# Altium PCB 800U R3N3_LED_V1.0.PcbDoc (part 2 of 2)
Units mm, origin at the board's own origin, x right, y up, seen from the top; angles counter-clockwise.
Board outline 308.48 x 220.22 mm, 4 copper layers (Top Layer, GND, Mid-Layer 2, Bottom Layer); 88 components, 70 nets, 229 pads, 84 vias.
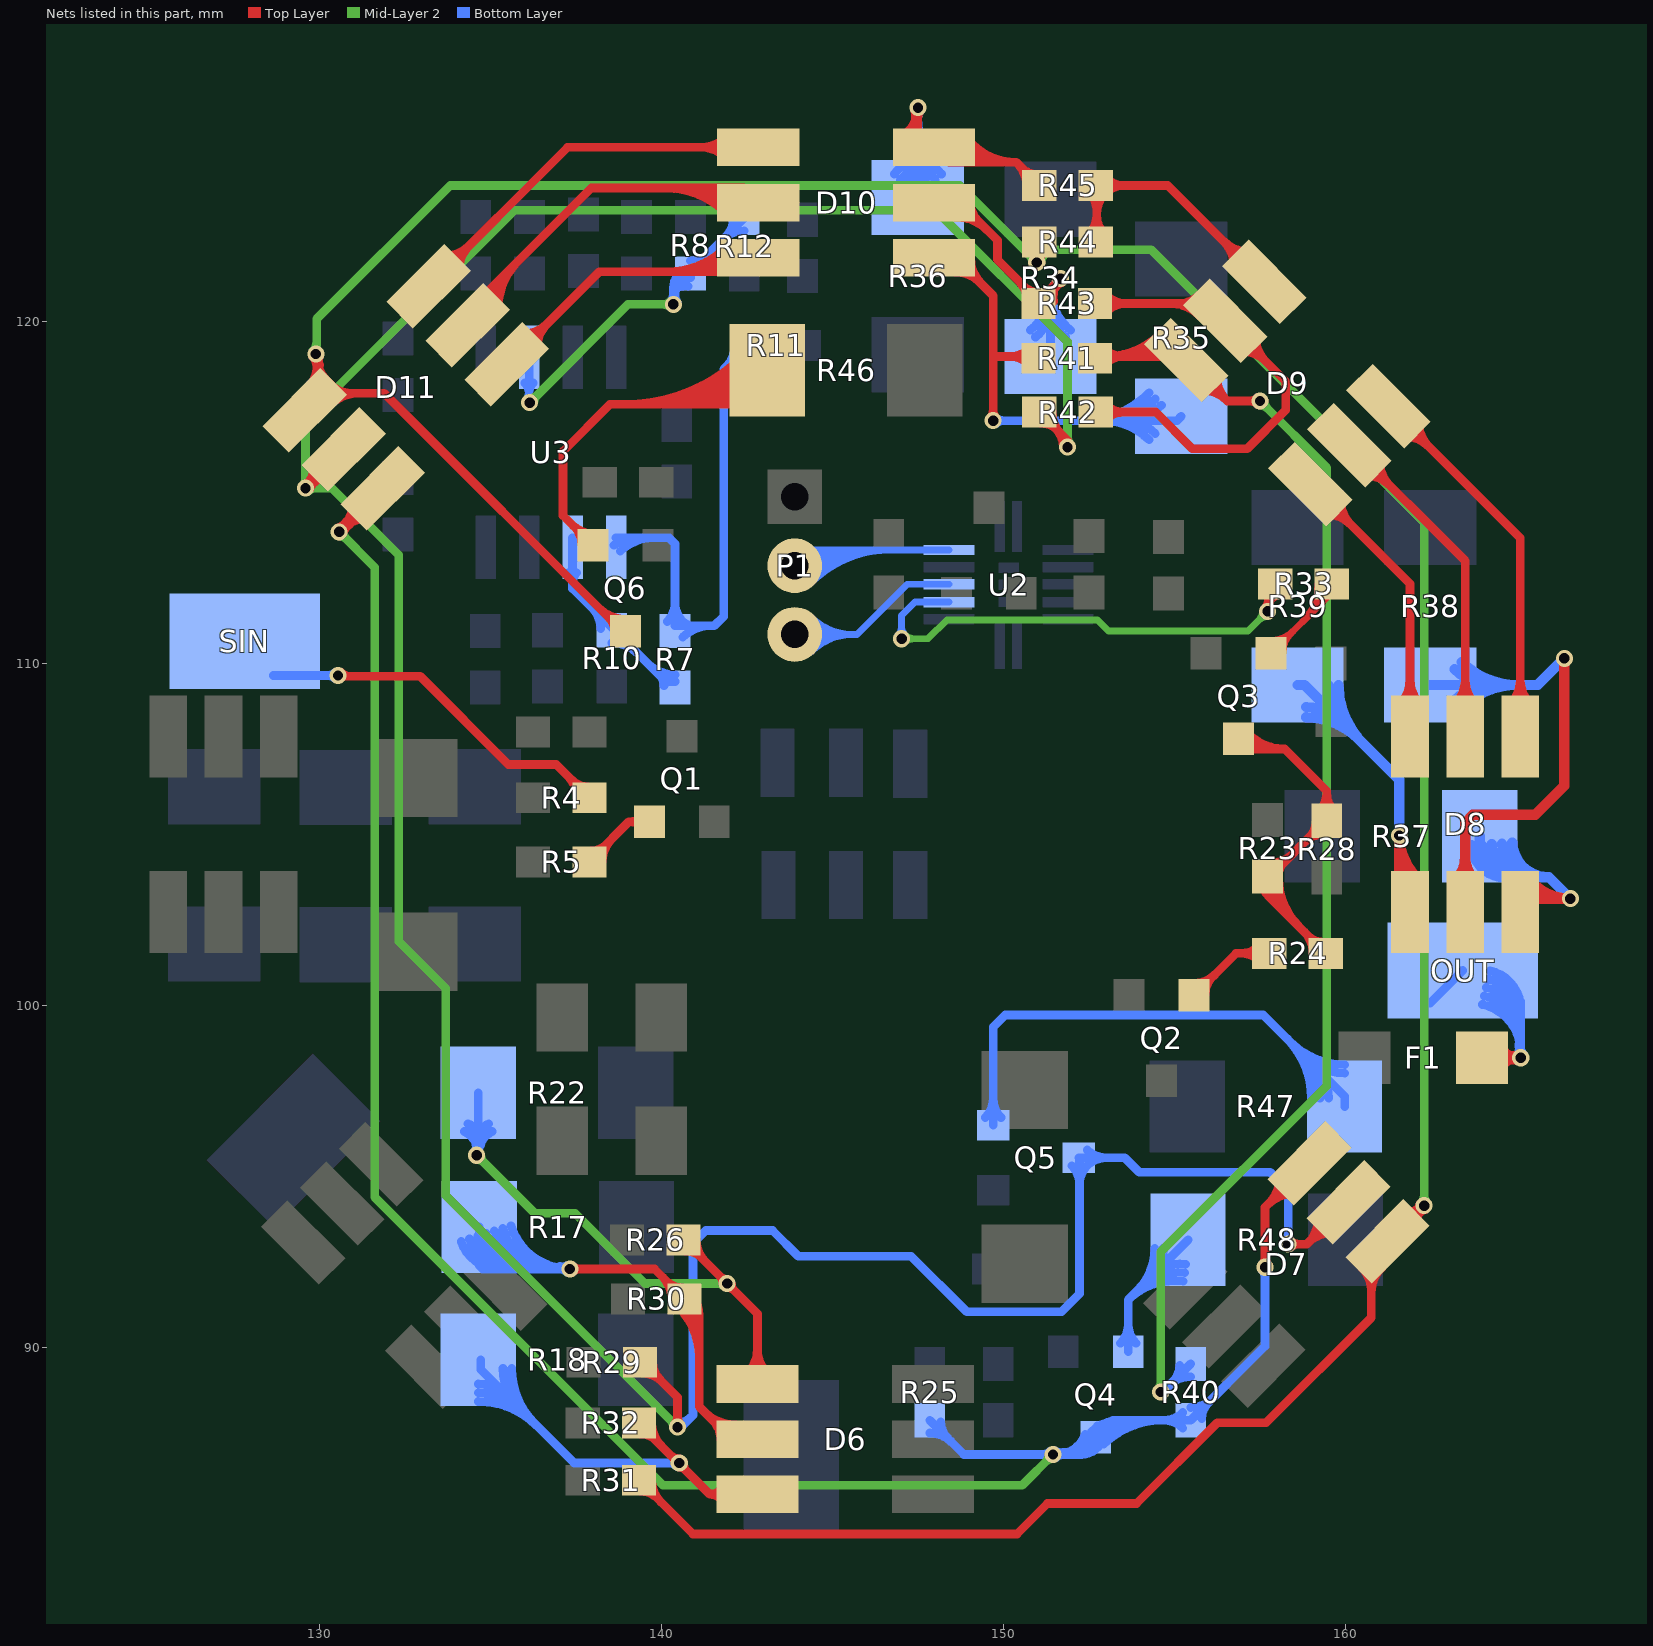
[diagram p4: the nets of this part, all layers, seen from the top]

## Via types
v1: diameter 0.5, hole 0.3, Top Layer to Bottom Layer, 77 vias
v2: diameter 0.8, hole 0.4, Top Layer to Bottom Layer, 7 vias

## Nets (pads, with @x,y where several pads share a name; then routed paths per layer and width w, separated by ;. In a path a pad name is that pad's centre, name@x,y a point inside that pad or via, vN(x,y) a via of type N, cw(c..) or ccw(c..) an arc to the next point about the centre after c; other vN are vias at no path point) (continued)
NetD6_4: D6.4 R22.2 R26.2 | length 24.3
  Top Layer w0.254: R26.2@140.65,93.15 v1(141.925,91.875) 142.81,90.99 D6.4@142.81,88.938 ; R26.2@140.7,92.827 cw(c140.7,92.168) 141.166,92.634 ; R26.2@141.023,93.15 ccw(c141.923,93.15) 141.287,92.513 ; v1@141.802,91.875 ccw(c141.505,91.875) 141.715,92.085 ccw(c141.925,92.295) v1@141.925,91.998 ; v1@141.925,91.752 cw(c141.925,91.455) 142.135,91.665 cw(c142.345,91.875) v1@142.048,91.875 ; D6.4@142.51,89.237 ccw(c141.788,89.959) 142.81,89.959 ccw(c143.831,89.959) D6.4@143.109,89.237
  Mid-Layer 2 w0.254: v1@134.6,95.502 cw(c134.6,95.205) 134.81,95.415 cw(c135.02,95.625) v1@134.723,95.625 ; v1(134.6,95.625) 136.3,93.925 137.475,93.925 139.525,91.875 v1(141.925,91.875) ; v1@141.838,91.788 ccw(c141.628,91.578) 141.628,91.875 ccw(c141.628,92.172) v1@141.838,91.962
  Bottom Layer w0.254: R22.2@134.24,96.318 cw(c133.941,95.675) v1@134.65,95.675 ; R22.2@134.347,96.548 cw(c134.126,96.073) 134.65,96.073 cw(c135.174,96.073) R22.2@134.953,96.548 ; v1@134.513,95.712 ccw(c134.182,96.043) 134.65,96.043 ; v1@134.519,95.718 ccw(c134.383,95.873) 134.583,95.927 ; v1@134.539,95.732 ccw(c134.33,96.093) 134.733,95.985 ; v1(134.6,95.625) v1@134.65,95.675 ; R22.2@134.65,97.45 v1@134.65,95.675 ; R22.2@135.06,96.318 ccw(c135.359,95.675) v1@134.65,95.675
NetD6_5: D6.5 R17.2 R30.2 | length 34.3
  Top Layer w0.254: v1(137.325,92.3) 139.8,92.3 R30.2@140.675,91.425 141.106,90.994 141.106,88.269 142.05,87.325 D6.5@142.81,87.325 ; v1@137.412,92.213 cw(c137.622,92.003) 137.622,92.3 cw(c137.622,92.597) v1@137.412,92.387 ; 140.038,92.062 cw(c139.401,91.425) R30.2@140.302,91.425 ; 140.159,91.941 ccw(c140.625,92.407) R30.2@140.625,91.748 ; R30.2@140.497,91.197 cw(c139.025,89.725) 141.106,89.725 ; R30.2@140.676,91.376 cw(c139.639,90.339) 141.106,90.339 ; R30.2@140.856,91.556 cw(c140.252,90.952) 141.106,90.952 ; 141.25,88.125 ccw(c142.16,89.034) D6.5@142.16,87.748 ; 141.515,87.86 cw(c140.98,87.325) D6.5@141.737,87.325 ; D6.5@141.684,87.691 ccw(c142.16,88.167) D6.5@142.16,87.494
  Bottom Layer w0.254: R17.2@134.149,93.111 ccw(c135.252,93.455) R17.2@135.252,92.3 ; R17.2@134.392,93.186 ccw(c135.597,93.563) R17.2@135.597,92.3 ; R17.2@134.634,93.262 ccw(c135.943,93.671) 135.943,92.3 ; R17.2@134.675,93.525 134.675,92.4 134.775,92.3 v1(137.325,92.3) cw(c137.325,94.103) R17.2@135.604,93.565 ; R17.2@134.876,93.338 ccw(c136.288,93.779) 136.288,92.3 ; R17.2@135.119,93.414 ccw(c136.634,93.887) 136.634,92.3 ; R17.2@135.361,93.49 ccw(c136.979,93.995) 136.979,92.3 ; v1@137.218,92.238 ccw(c136.961,92.09) 137.038,92.377 ccw(c137.115,92.664) v1@137.263,92.407 ; v1@137.238,92.213 ccw(c137.028,92.003) 137.028,92.3 ccw(c137.028,92.597) v1@137.238,92.387
NetD6_6: D6.6 R18.2 R32.2 | length 22.4
  Top Layer w0.254: R32.2@139.35,87.775 141.413,85.712 ; R32.2@139.4,87.477 cw(c139.4,86.878) 139.823,87.302 ; R32.2@139.723,87.8 ccw(c140.684,87.8) 140.004,87.121 ; 140.272,86.853 ccw(c140.525,87.105) v1@140.525,86.748 ; 140.333,86.792 cw(c140.165,86.625) v1@140.402,86.625 ; v1@140.525,86.502 cw(c140.525,86.265) 140.692,86.433 ; v1@140.648,86.625 ccw(c141.005,86.625) 140.753,86.372 ; D6.6@141.797,85.495 ccw(c141.413,85.265) 141.413,85.712 ; D6.6@141.797,85.93 cw(c141.413,86.16) 141.413,85.712 ; D6.6@142.81,85.712 141.413,85.712
  Bottom Layer w0.254: R18.2@134.65,88.427 cw(c134.65,86.018) 136.354,87.721 ; R18.2@134.65,88.681 cw(c134.65,86.885) 135.92,88.155 ; R18.2@134.65,88.935 cw(c134.65,87.752) R18.2@135.486,88.589 ; R18.2@134.725,89.65 134.725,89.35 137.45,86.625 v1(140.525,86.625) ; R18.2@135.369,89.4 ccw(c137.044,89.4) 135.86,88.215 ; R18.2@135.623,89.4 ccw(c137.912,89.4) 136.293,87.782 ; v1@140.438,86.538 ccw(c140.228,86.328) 140.228,86.625 ccw(c140.228,86.922) v1@140.438,86.712
NetD7_1: D7.1 D11.1 Q6.3 R31.2 R44.2 | length 116.4
  Top Layer w0.254: D11.1@129.731,118.16 ccw(c129.263,118.629) 129.925,118.629 ; v1@129.813,118.963 cw(c129.543,118.693) 129.925,118.693 ; v1@129.838,118.943 cw(c129.66,118.634) 130.005,118.727 ; v1(129.9,119.05) v1@129.925,119.025 ; D11.1@129.925,118.465 ccw(c130.559,118.465) D11.1@130.141,117.988 ; 129.983,118.809 cw(c130.211,118.87) v1@130.007,118.989 ; D11.1@130.309,118.179 cw(c131.048,119.025) v1@129.925,119.025 ; D11.1@130.329,117.562 cw(c131.145,116.746) 131.145,117.9 ; D11.1@130.329,118.16 ccw(c130.957,118.788) 130.957,117.9 ; 138.185,111.615 ccw(c138.95,112.38) Q6.3@138.95,111.298 ; 138.487,111.313 cw(c138.149,110.975) Q6.3@138.627,110.975 ; Q6.3@138.95,110.95 138.85,110.95 131.9,117.9 130.069,117.9 D11.1@129.57,117.401 129.925,117.756 v1@129.925,119.025 ; R31.2@139.375,86.1 140.925,84.55 150.4,84.55 151.292,85.442 153.892,85.442 156.25,87.8 157.675,87.8 160.75,90.875 160.75,92.625 D7.1@161.23,93.105 v1@162.275,94.15 ; R31.2@139.4,85.802 cw(c139.4,85.143) 139.866,85.609 ; R31.2@139.723,86.125 ccw(c140.623,86.125) 139.987,85.488 ; v1@150.888,121.812 ccw(c150.437,122.263) R44.2@151.075,122.263 ; R44.2@150.942,122.031 cw(c150.85,121.825) v1@151.075,121.825 ; v1(150.975,121.725) v1@151.075,121.825 ; R44.2@151.075,122.325 v1@151.075,121.825 ; R44.2@151.208,122.031 ccw(c151.3,121.825) v1@151.075,121.825 ; D7.1@160.471,92.346 cw(c159.797,91.672) 160.75,91.672 ; 160.75,91.576 cw(c161.839,91.576) D7.1@161.069,92.346 ; D7.1@161.756,93.982 ccw(c161.851,94.574) v1@162.275,94.15 ; D7.1@162.012,93.998 cw(c162.179,93.709) v1@162.268,94.031 ; D7.1@162.047,93.922 cw(c162.3,93.67) v1@162.3,94.027 ; 162.063,94.028 ccw(c161.936,94.248) v1@162.181,94.182 ; D7.1@162.107,93.631 cw(c162.699,93.726) v1@162.275,94.15 ; 162.108,93.983 ccw(c161.941,94.15) v1@162.177,94.15 ; D7.1@162.113,93.87 cw(c162.406,93.701) v1@162.328,94.03 ; v1(162.3,94.15) v1@162.275,94.15
  Mid-Layer 2 w0.254: v1@129.813,119.137 ccw(c129.543,119.407) 129.925,119.407 ; v1(129.9,119.05) 129.925,119.075 129.925,120.075 133.825,123.975 148.725,123.975 v1(150.975,121.725) 151.35,122.1 154.325,122.1 162.3,114.125 v1(162.3,94.15) ; v1@150.852,121.725 ccw(c150.555,121.725) 150.765,121.935 ccw(c150.975,122.145) 150.975,121.848 ccw(c150.975,122.145) 151.185,121.935 ccw(c151.395,121.725) v1@151.098,121.725 ; v1@162.213,94.237 ccw(c162.003,94.447) 162.3,94.447 ccw(c162.597,94.447) v1@162.387,94.237
NetD7_2: D7.2 D11.2 Q5.3 R29.2 R42.2 | length 115.2
  Top Layer w0.254: v1@129.568,115.244 ccw(c129.502,115.489) 129.723,115.362 ; v1(129.6,115.125) v1@129.6,115.15 ; v1@129.6,115.248 ccw(c129.6,115.485) 129.767,115.317 ; v1@129.719,115.093 cw(c130.077,114.997) 129.892,115.318 ; v1@129.719,115.157 cw(c130.047,115.245) 129.753,115.415 ; v1@129.723,115.125 cw(c130.08,115.125) 129.828,115.378 ; D11.2@129.83,115.769 cw(c129.04,115.71) v1@129.6,115.15 ; D11.2@130.219,115.38 ccw(c130.16,114.59) v1@129.6,115.15 ; D11.2@130.711,116.261 v1@129.6,115.15 ; R29.2@139.35,89.45 139.575,89.45 140.475,88.55 v1(140.475,87.675) ; R29.2@139.425,89.252 cw(c139.425,88.412) 140.019,89.006 ; R29.2@139.748,89.575 ccw(c140.467,89.575) 139.959,89.066 ; v1@140.388,87.762 ccw(c140.178,87.972) 140.475,87.972 ccw(c140.772,87.972) v1@140.562,87.762 ; R42.2@151.05,117.35 151.875,116.525 v1@151.875,116.35 ; R42.2@151.1,117.027 cw(c151.1,116.368) 151.566,116.834 ; R42.2@151.423,117.35 ccw(c152.323,117.35) 151.687,116.713 ; 151.524,116.876 cw(c150.972,116.325) v1@151.752,116.325 ; v1(158.325,93.025) 158.869,93.025 D7.2@160.089,94.245 ; v1@158.412,92.938 cw(c158.622,92.728) 158.622,93.025 cw(c158.622,93.322) v1@158.412,93.112 ; D7.2@159.206,93.785 cw(c158.185,93.785) 158.907,93.063 cw(c159.629,92.341) D7.2@159.629,93.362
  Mid-Layer 2 w0.254: v1@129.513,115.212 ccw(c129.303,115.422) 129.6,115.422 ccw(c129.897,115.422) 129.687,115.212 ccw(c129.897,115.422) 129.897,115.125 ccw(c129.897,114.828) v1@129.687,115.038 ; v1@140.352,87.675 ccw(c140.055,87.675) 140.265,87.885 ccw(c140.475,88.095) v1@140.475,87.798 ; v1(140.475,87.675) 133.7,94.45 133.7,100.5 132.325,101.875 132.325,113.175 130.375,115.125 v1(129.6,115.125) 129.6,117.15 135.7,123.25 148.025,123.25 151.875,119.4 v1@151.875,116.35 ; v1@151.788,116.412 ccw(c151.578,116.622) 151.875,116.622 ccw(c152.172,116.622) v1@151.962,116.412
  Bottom Layer w0.254: v1(140.475,87.675) 140.525,87.625 140.925,88.025 140.925,93.05 141.3,93.425 143.25,93.425 144,92.675 147.3,92.675 148.925,91.05 151.7,91.05 152.225,91.575 Q5.3@152.225,95.55 ; v1@140.475,87.798 ccw(c140.475,88.336) 140.856,87.956 ; Q5.3@151.997,95.322 cw(c151.445,94.77) 152.225,94.77 cw(c153.005,94.77) 152.453,95.322 cw(c153.005,94.77) 153.005,95.55 cw(c153.005,96.33) Q5.3@152.453,95.778 ; Q5.3@152.2,95.55 153.55,95.55 153.975,95.125 157.8,95.125 158.325,94.6 v1(158.325,93.025) ; v1@158.238,93.112 ccw(c158.028,93.322) 158.325,93.322 ccw(c158.622,93.322) v1@158.412,93.112
  other v1: 151.875,116.325
NetD7_3: D7.3 D11.3 Q4.3 R25.2 R40.2 | length 82.9
  Top Layer w0.254: v1@130.549,113.969 ccw(c130.444,114.363) 130.797,114.159 ; v1(130.581,113.85) D11.3@131.851,115.12 ; v1@130.581,113.973 ccw(c130.581,114.27) 130.791,114.06 ccw(c131.001,113.85) v1@130.704,113.85 ; v1@130.7,113.818 cw(c131.094,113.713) 130.89,114.066 ; D11.3@130.969,114.661 cw(c129.948,114.661) 130.67,113.939 cw(c131.392,113.217) D11.3@131.392,114.238 ; v1@157.563,92.437 ccw(c157.353,92.647) 157.65,92.647 ccw(c157.947,92.647) v1@157.737,92.437 ; v1(157.65,92.35) 157.65,94.1 158.936,95.386 D7.3@158.949,95.386 ; 157.745,94.195 cw(c158.489,93.45) D7.3@158.489,94.503 ; 157.776,94.226 ccw(c157.076,94.926) D7.3@158.066,94.926
  Mid-Layer 2 w0.254: v1@130.581,113.727 cw(c130.581,113.43) 130.791,113.64 cw(c131.001,113.85) v1@130.704,113.85 ; v1(130.581,113.85) 131.625,112.806 131.625,94.4 140.05,85.975 150.55,85.975 v1(151.45,86.875) ; v1@151.327,86.875 cw(c151.03,86.875) 151.24,86.665 cw(c151.45,86.455) v1@151.45,86.752
  Bottom Layer w0.254: R25.2@147.85,87.502 cw(c147.85,86.602) 148.487,87.238 ; R25.2@147.85,87.875 148.85,86.875 v1(151.45,86.875) ; R25.2@148.173,87.825 ccw(c148.832,87.825) 148.366,87.359 ; v1@151.363,86.788 ccw(c151.153,86.578) 151.153,86.875 ccw(c151.153,87.172) v1@151.363,86.962 ; v1@151.45,86.775 v1@151.55,86.875 ; v1@151.511,86.982 ccw(c151.704,87.315) 151.804,86.943 ; v1@151.537,86.788 cw(c151.747,86.578) 151.747,86.875 cw(c151.747,87.172) v1@151.537,86.962 ; 151.916,86.875 ccw(c151.916,87.643) Q4.3@152.635,87.374 ; 152.282,86.875 ccw(c152.282,87.506) Q4.3@152.873,87.285 ; Q4.3@152.377,87.334 cw(c151.77,87.305) 152.2,86.875 ; Q4.3@152.397,87.463 cw(c151.55,87.78) v1@151.55,86.875 ; Q4.3@152.569,87.531 cw(c153.4,86.7) 153.4,87.875 ; Q4.3@152.657,87.03 ccw(c152.585,86.49) 152.2,86.875 ; Q4.3@152.743,87.72 ccw(c152.815,88.26) 153.2,87.875 ; Q4.3@152.749,87.351 cw(c154.013,86.087) 154.013,87.875 ; Q4.3@152.928,87.172 cw(c154.627,85.473) 154.627,87.875 ; Q4.3@153.023,87.416 cw(c153.63,87.445) 153.2,87.875 ; R40.2@155.247,87.647 ccw(c154.695,87.095) 154.695,87.875 ccw(c154.695,88.655) R40.2@155.247,88.103 ; R40.2@155.475,88.248 ccw(c155.475,89.148) 156.112,88.512 ; R40.2@155.798,87.925 cw(c156.457,87.925) 155.991,88.391 ; v1@157.563,92.263 cw(c157.353,92.053) 157.65,92.053 cw(c157.947,92.053) v1@157.737,92.263 ; v1(157.65,92.35) 157.65,90.05 R40.2@155.475,87.875 153.2,87.875 ; v1@151.55,86.875 152.2,86.875 ; 152.2,86.875 Q4.3@152.7,87.375 153.2,87.875
NetD8_1: D8.1 D9.6 | length 14.5
  Top Layer w0.254: D9.6@161.255,117.526 165.113,113.668 D8.1@165.113,107.865 ; D9.6@161.714,116.644 cw(c161.714,115.623) 162.436,116.345 cw(c163.158,117.067) D9.6@162.137,117.067 ; D8.1@164.814,108.815 ccw(c164.092,109.537) 165.113,109.537 ccw(c166.134,109.537) D8.1@165.412,108.815
NetD8_2: D8.2 D9.5 | length 13.1
  Top Layer w0.254: D9.5@160.114,116.386 163.5,113 D8.2@163.5,107.865 ; D9.5@160.574,115.503 cw(c160.574,114.482) 161.296,115.204 cw(c162.018,115.926) D9.5@160.997,115.926 ; D8.2@163.201,108.815 ccw(c162.479,109.537) 163.5,109.537 ccw(c164.521,109.537) D8.2@163.799,108.815
NetD8_3: D8.3 D9.4 | length 11.8
  Top Layer w0.254: D9.4@158.974,115.245 161.887,112.332 D8.3@161.887,107.865 ; D9.4@159.433,114.363 cw(c159.433,113.342) 160.155,114.064 cw(c160.877,114.786) D9.4@159.856,114.786 ; D8.3@161.588,108.815 ccw(c160.866,109.537) 161.887,109.537 ccw(c162.908,109.537) D8.3@162.186,108.815
NetD8_4: D8.4 R39.2 | length 16.6
  Top Layer w0.3: 161.575,104.305 ccw(c162.709,104.305) D8.4@161.954,103.459 ; D8.4@161.887,102.735 161.575,103.047 v1(161.575,104.975) ccw(c163.307,104.975) D8.4@162.153,103.683
  Bottom Layer w0.3: R39.2@158.6,109.375 158.8,109.375 161.575,106.6 v1(161.575,104.975) ; R39.2@158.85,108.425 cw(c158.85,106.252) 160.386,107.789 ; R39.2@158.85,108.725 cw(c158.85,107.276) R39.2@159.874,108.301 ; R39.2@159.5,109.375 ccw(c161.19,109.375) 159.995,108.18 ; R39.2@159.8,109.375 ccw(c162.214,109.375) 160.507,107.668
NetD8_5: D8.5 R38.2 | length 21.5
  Top Layer w0.3: D8.5@163.217,103.667 ccw(c162.534,104.35) 163.5,104.35 ccw(c164.466,104.35) D8.5@163.783,103.667 ; D8.5@163.5,102.735 163.5,105.35 163.725,105.575 165.55,105.575 166.4,106.425 v1(166.4,110.15)
  Bottom Layer w0.3: R38.2@162.475,109.375 165.625,109.375 v1(166.4,110.15) ; R38.2@163.185,108.915 cw(c164.294,107.806) 164.294,109.375 cw(c164.294,110.944) R38.2@163.185,109.835 ; R38.2@163.397,108.703 cw(c165.019,107.081) 165.019,109.375 cw(c165.019,111.669) R38.2@163.397,110.047
NetD8_6: D8.6 R37.2 | length 15.2
  Top Layer w0.3: D8.6@165.113,102.735 165.503,103.125 v1(166.575,103.125) cw(c166.575,104.675) D8.6@165.413,103.649 ; D8.6@165.188,103.451 ccw(c165.91,104.088) 165.91,103.125
  Bottom Layer w0.3: R37.2@163.676,104.684 ccw(c164.671,104.748) R37.2@164.671,103.75 ; R37.2@163.925,104.95 163.925,104.575 164.75,103.75 165.95,103.75 ; R37.2@163.975,104.703 ccw(c164.991,104.768) R37.2@164.991,103.75 ; R37.2@164.274,104.722 ccw(c165.31,104.788) 165.31,103.75 ; R37.2@164.574,104.741 ccw(c165.63,104.809) 165.63,103.75 ; R37.2@164.873,104.76 ccw(c165.95,104.829) 165.95,103.75 ; v1(166.575,103.125) 165.95,103.75
NetD9_1: D9.1 R44.1 R45.1 | length 13
  Top Layer w0.254: R44.1@152.497,122.553 ccw(c151.945,123.105) 152.725,123.105 ccw(c153.505,123.105) R44.1@152.953,122.553 ; R45.1@152.522,123.747 cw(c152.031,123.256) 152.725,123.256 ; R44.1@152.725,122.325 152.725,123.95 R45.1@152.7,123.975 154.806,123.975 D9.1@157.626,121.155 ; 152.725,123.135 cw(c153.59,123.135) 152.978,123.747 cw(c153.53,123.195) 153.53,123.975 cw(c153.53,124.755) R45.1@152.978,124.203 ; D9.1@156.744,121.614 ccw(c155.723,121.614) 156.445,122.336 ccw(c157.167,123.058) D9.1@157.167,122.037
NetD9_2: D9.2 R42.1 R43.1 | length 19.3
  Top Layer w0.254: R43.1@152.75,120.525 155.975,120.525 D9.2@156.486,120.014 158.25,118.25 158.25,117.4 157.125,116.275 155.525,116.275 154.45,117.35 R42.1@152.775,117.35 ; R42.1@152.978,117.122 cw(c153.53,116.57) 153.53,117.35 cw(c153.53,118.13) R42.1@152.978,117.578 ; R43.1@153.028,120.297 cw(c153.58,119.745) 153.58,120.525 cw(c153.58,121.305) R43.1@153.028,120.753 ; 154.881,120.525 cw(c154.881,119.328) D9.2@155.727,120.175 ; 155.129,120.525 ccw(c155.129,121.371) D9.2@155.727,120.773 ; D9.2@156.946,119.131 cw(c156.946,118.11) 157.668,118.832 cw(c158.39,119.554) D9.2@157.369,119.554
NetD9_3: D9.3 R40.1 R41.1 | length 48.5
  Top Layer w0.254: R41.1@152.675,118.975 155.244,118.975 D9.3@155.345,118.874 156.544,117.675 v1(157.5,117.675) ; R41.1@152.953,118.747 cw(c153.505,118.195) 153.505,118.975 cw(c153.505,119.755) R41.1@152.953,119.203 ; R41.1@153,118.975 ccw(c153,121.219) D9.3@154.587,119.632 ; 153.613,118.975 ccw(c153.613,120.606) D9.3@154.766,119.453 ; 154.226,118.975 ccw(c154.226,119.993) D9.3@154.946,119.273 ; D9.3@155.805,117.991 cw(c155.805,116.97) 156.527,117.692 cw(c157.249,118.414) D9.3@156.228,118.414 ; v1@157.413,117.588 ccw(c157.203,117.378) 157.203,117.675 ccw(c157.203,117.972) v1@157.413,117.762
  Mid-Layer 2 w0.254: v1@154.513,88.787 ccw(c154.303,88.997) 154.6,88.997 ccw(c154.897,88.997) v1@154.687,88.787 ; v1(154.6,88.7) 154.6,92.8 159.45,97.65 159.45,115.725 v1(157.5,117.675) ; v1@157.5,117.552 cw(c157.5,117.255) 157.71,117.465 cw(c157.92,117.675) v1@157.623,117.675
  Bottom Layer w0.254: v1(154.6,88.7) 154.675,88.625 154.675,88.725 R40.1@155.475,89.525 ; v1@154.6,88.823 ccw(c154.6,89.241) 154.895,88.945 ; v1@154.719,88.668 cw(c155.15,88.553) 154.927,88.939 ; 154.838,88.888 cw(c155.475,88.251) R40.1@155.475,89.152 ; 154.959,89.009 ccw(c154.493,89.475) R40.1@155.152,89.475
NetD10_1: D10.1 D11.6 | length 14.5
  Top Layer w0.254: D11.6@133.199,121.03 137.257,125.088 D10.1@142.835,125.088 ; D11.6@133.658,121.912 ccw(c133.658,122.933) 134.38,122.211 ccw(c135.102,121.489) D11.6@134.081,121.489 ; D10.1@141.885,124.789 ccw(c141.163,124.067) 141.163,125.088 ccw(c141.163,126.109) D10.1@141.885,125.387
NetD10_2: D10.2 D11.5 | length 18.2
  Top Layer w0.254: D11.5@134.339,119.889 134.339,120.289 137.95,123.9 142.41,123.9 D10.2@142.835,123.475 ; D11.5@134.714,120.349 cw(c135.474,120.349) D11.5@134.936,120.886 ; D11.5@134.968,120.349 cw(c136.341,120.349) 135.37,121.32 ; D11.5@135.222,120.349 cw(c137.209,120.349) 135.804,121.754 ; 140.137,123.9 cw(c140.137,121.428) D10.2@141.885,123.176 ; 140.751,123.9 cw(c140.751,122.041) D10.2@142.065,123.356 ; 141.364,123.9 cw(c141.364,122.654) D10.2@142.245,123.535
NetD10_3: D10.3 D11.4 | length 14.5
  Top Layer w0.254: D11.4@135.48,118.749 138.181,121.45 142.422,121.45 D10.3@142.835,121.862 ; D11.4@135.939,119.631 ccw(c135.939,120.652) 136.661,119.93 ccw(c137.383,119.208) D11.4@136.362,119.208 ; 140.168,121.45 ccw(c140.168,123.878) D10.3@141.885,122.161 ; 140.782,121.45 ccw(c140.782,123.265) D10.3@142.065,121.982 ; 141.395,121.45 ccw(c141.395,122.652) D10.3@142.245,121.802
NetD10_4: D10.4 R35.2 R41.2 | length 24.1
  Top Layer w0.254: D10.4@147.965,121.862 148.588,121.862 149.7,120.75 v1(149.7,117.1) ; D10.4@148.615,121.439 cw(c148.615,120.484) 149.291,121.159 ; D10.4@149.038,121.862 ccw(c150.126,121.862) 149.357,121.093 ; v1@149.613,117.187 ccw(c149.403,117.397) 149.7,117.397 ccw(c149.997,117.397) v1@149.787,117.187 ; 149.725,118.975 R41.2@151.025,118.975 ; R41.2@150.747,118.747 ccw(c150.195,118.195) 150.195,118.975 ccw(c150.195,119.755) R41.2@150.747,119.203
  Bottom Layer w0.254: v1(149.7,117.1) 155.075,117.1 R35.2@155.2,117.225 ; v1@149.787,117.013 cw(c149.997,116.803) 149.997,117.1 cw(c149.997,117.397) v1@149.787,117.187 ; 152.299,117.1 ccw(c152.299,119.876) R35.2@154.262,117.913 ; 152.903,117.1 cw(c152.903,115.178) R35.2@154.262,116.537 ; 152.912,117.1 ccw(c152.912,119.263) R35.2@154.442,117.733 ; 153.516,117.1 cw(c153.516,115.791) R35.2@154.442,116.717 ; 153.526,117.1 ccw(c153.526,118.649) R35.2@154.621,117.554
NetD10_5: D10.5 R34.2 R43.2 | length 18.6
  Top Layer w0.254: D10.5@147.965,123.475 148.725,123.475 149.825,122.375 149.825,121.8 151.1,120.525 151.1,120.675 v1(151.675,121.25) ccw(c152.205,120.719) R43.2@151.468,120.584 ; D10.5@148.615,123.052 cw(c148.615,121.766) 149.525,122.675 ; D10.5@148.615,123.306 cw(c148.615,122.633) D10.5@149.091,123.109 ; D10.5@149.038,123.475 ccw(c149.795,123.475) 149.26,122.94 ; 150.463,121.162 cw(c149.827,120.525) R43.2@150.727,120.525 ; 150.584,121.041 ccw(c151.05,121.507) R43.2@151.05,120.848 ; R43.2@151.15,120.848 ccw(c151.15,121.145) R43.2@151.36,120.935 ; v1@151.552,121.25 cw(c151.255,121.25) 151.465,121.04 cw(c151.675,120.83) v1@151.675,121.127 ; v1@151.556,121.218 cw(c151.269,121.141) 151.527,120.993 cw(c151.784,120.844) v1@151.707,121.131
  Bottom Layer w0.254: R34.2@150.782,119.746 ccw(c149.857,120.95) 151.375,120.95 ; R34.2@150.937,119.545 ccw(c150.253,120.434) 151.375,120.434 ccw(c152.497,120.434) R34.2@151.813,119.545 ; R34.2@151.375,118.975 151.375,120.95 ; v1@151.552,121.25 cw(c151.255,121.25) 151.465,121.04 cw(c151.675,120.83) v1@151.675,121.127 ; v1(151.675,121.25) 151.375,120.95 ; R34.2@151.968,119.746 cw(c152.893,120.95) 151.375,120.95
NetD10_6: D10.6 R36.2 R45.2 | length 24.1
  Top Layer w0.254: D10.6@147.074,125.435 ccw(c146.508,126.25) v1(147.5,126.25) 147.5,125.553 D10.6@147.965,125.088 148.403,124.65 150.375,124.65 R45.2@151.05,123.975 ; D10.6@147.219,125.227 ccw(c146.846,125.764) 147.5,125.764 ; v1@147.393,126.189 cw(c147.136,126.04) 147.423,125.963 cw(c147.71,125.886) v1@147.561,126.143 ; v1@147.413,126.163 cw(c147.203,125.953) 147.5,125.953 cw(c147.797,125.953) v1@147.587,126.163 ; 147.5,125.663 ccw(c147.891,125.663) D10.6@147.615,125.387 ; D10.6@148.548,125.036 ccw(c149.337,125.649) 149.337,124.65 ; D10.6@148.749,125.192 ccw(c149.856,126.052) 149.856,124.65 ; D10.6@148.949,125.347 ccw(c150.375,126.456) 150.375,124.65 ; 150.413,124.612 cw(c149.777,123.975) R45.2@150.677,123.975 ; 150.534,124.491 ccw(c151,124.957) R45.2@151,124.298
  Bottom Layer w0.254: R36.2@146.812,124.313 ccw(c145.151,125.974) 147.5,125.974 ccw(c149.849,125.974) R36.2@148.188,124.313 ; R36.2@146.992,124.133 ccw(c145.764,125.361) 147.5,125.361 ccw(c149.236,125.361) R36.2@148.008,124.133 ; R36.2@147.171,123.954 ccw(c146.377,124.748) 147.5,124.748 ccw(c148.623,124.748) R36.2@147.829,123.954 ; v1@147.413,126.163 cw(c147.203,125.953) 147.5,125.953 cw(c147.797,125.953) v1@147.587,126.163 ; R36.2@147.5,123.625 v1(147.5,126.25)
NetLED_CTL_1: 
NetP1_2: P1.2 U2.10 | length 13.7
  Bottom Layer w0.2: P1.2@143.829,112.931 cw(c144.765,111.995) 144.765,113.318 ; P1.2@143.971,112.789 cw(c145.248,111.512) 145.248,113.318 ; P1.2@144.112,112.648 cw(c145.731,111.029) 145.731,113.318 ; P1.2@144.254,112.506 cw(c146.214,110.546) 146.214,113.318 ; P1.2@144.358,113.318 U2.10@148.412,113.318 ; P1.2@144.395,112.365 cw(c146.697,110.063) 146.697,113.318
  Bottom Layer w0.254: P1.2@143.9,112.86 P1.2@144.358,113.318
NetP1_3: P1.3 U2.8 | length 9.7
  Bottom Layer w0.2: P1.3@143.9,110.85 145.725,110.85 147.193,112.318 U2.8@148.412,112.318 ; P1.3@144.254,110.496 cw(c145.107,109.643) 145.107,110.85 cw(c145.107,112.057) P1.3@144.254,111.204 ; P1.3@144.395,110.355 cw(c145.59,109.16) 145.59,110.85 cw(c145.59,112.54) P1.3@144.395,111.345
NetQ1_1: Q1.1 R5.2 | length 4.8
  Top Layer w0.254: R5.2@137.9,104.4 138.075,104.4 139.05,105.375 ; R5.2@137.95,104.523 ccw(c137.95,105.122) 138.373,104.698 ; R5.2@138.273,104.2 cw(c139.234,104.2) 138.554,104.879 ; Q1.1@139.596,105.148 ccw(c139.05,104.607) 139.05,105.375 ; Q1.1@139.596,105.602 cw(c139.05,106.143) 139.05,105.375 ; Q1.1@139.825,105.375 139.05,105.375
NetQ2_1: Q2.1 R24.2 | length 5.2
  Top Layer w0.254: Q2.1@155.575,100.3 156.8,101.525 R24.2@157.775,101.525 ; Q2.1@155.575,100.648 ccw(c155.575,101.488) 156.169,100.894 ; Q2.1@155.898,100.325 cw(c156.617,100.325) 156.109,100.834 ; R24.2@157.497,101.297 ccw(c156.945,100.745) 156.945,101.525 ccw(c156.945,102.305) R24.2@157.497,101.753
NetQ3_1: Q3.1 R33.1 | length 6.2
  Top Layer w0.2: Q3.1@157.825,110.3 159.6,112.075 R33.1@159.6,112.325 ; Q3.1@157.825,110.675 ccw(c157.825,111.58) 158.465,110.94 ; Q3.1@158.175,110.325 cw(c158.96,110.325) 158.405,110.88 ; 158.74,111.215 ccw(c157.631,112.325) R33.1@159.2,112.325 ; 159.082,111.557 ccw(c158.314,112.325) R33.1@159.4,112.325
NetQ3_3: Q3.3 R23.1 R24.1 R28.1 | length 20.2
  Top Layer w0.254: Q3.3@156.875,107.8 157.175,107.5 158.225,107.5 ; Q3.3@156.926,107.821 ccw(c157.652,108.479) 157.652,107.5 ; Q3.3@157.114,107.992 ccw(c158.225,109) 158.225,107.5 ; R23.1@157.54,103.725 ccw(c158.3,103.725) 157.763,103.187 ; R23.1@157.592,103.431 cw(c157.5,103.225) 157.725,103.225 ; R23.1@157.725,104.148 ccw(c157.725,105.23) 158.49,104.465 ; R23.1@157.794,103.725 ccw(c159.168,103.725) 158.196,102.754 ; R23.1@157.858,103.431 ccw(c157.95,103.225) 157.725,103.225 ; R23.1@158.048,103.725 ccw(c160.035,103.725) 158.63,102.32 ; R23.1@158.048,103.825 cw(c158.526,103.825) 158.188,104.163 ; 158.771,104.746 cw(c159.45,104.066) R28.1@159.45,105.027 ; 158.788,102.162 cw(c158.152,101.525) R24.1@159.052,101.525 ; 158.909,102.041 ccw(c159.375,102.507) R24.1@159.375,101.848 ; 158.952,104.927 ccw(c158.528,105.35) R28.1@159.127,105.35 ; R28.1@159.222,105.678 ccw(c158.67,106.23) 159.45,106.23 ccw(c160.23,106.23) R28.1@159.678,105.678 ; R24.1@159.425,101.525 157.725,103.225 ; 157.725,103.225 R23.1@157.725,103.775 157.8,103.775 159.425,105.4 R28.1@159.45,105.4 159.45,106.275 158.225,107.5
NetQ4_2: Q4.2 R48.1 | length 11.7
  Bottom Layer w0.254: Q4.2@153.422,90.128 ccw(c152.87,90.68) 153.65,90.68 ccw(c154.43,90.68) Q4.2@153.878,90.128 ; Q4.2@153.65,89.875 153.65,91.4 ; 153.916,91.666 ccw(c152.682,92.9) R48.1@154.427,92.9 ; 154.009,91.759 cw(c155.082,90.686) R48.1@155.298,92.188 ; R48.1@154.349,92.099 ccw(c153.549,92.9) R48.1@154.681,92.9 ; R48.1@154.368,92.118 cw(c155.172,91.314) R48.1@155.334,92.44 ; R48.1@155.262,91.937 ccw(c154.992,90.058) 153.65,91.4 ; R48.1@155.4,93.15 153.65,91.4
NetQ5_2: Q5.2 R47.1 | length 23.2
  Bottom Layer w0.254: Q5.2@149.472,96.728 ccw(c148.92,97.28) 149.7,97.28 ccw(c150.48,97.28) Q5.2@149.928,96.728 ; Q5.2@149.7,96.5 149.7,99.375 150.05,99.725 157.6,99.725 159.975,97.35 R47.1@159.975,97.05 ; 158.279,99.046 cw(c156.532,97.3) R47.1@159.002,97.3 ; 158.399,98.926 ccw(c159.975,100.501) R47.1@159.975,98.273 ; 158.712,98.613 cw(c157.399,97.3) R47.1@159.256,97.3 ; 158.833,98.492 ccw(c159.975,99.634) R47.1@159.975,98.019 ; R47.1@159.146,98.179 cw(c158.267,97.3) R47.1@159.51,97.3
NetQ6_2: Q6.2 R46.1 | length 27.2
  Top Layer w0.254: 137.406,114.044 ccw(c138,114.638) Q6.2@138,113.798 ; 137.466,113.984 cw(c136.958,113.475) Q6.2@137.677,113.475 ; Q6.2@138,113.45 137.125,114.325 137.125,116.2 138.5,117.575 142.1,117.575 R46.1@143.1,118.575 ; 138.94,117.575 ccw(c138.94,122.485) R46.1@142.412,119.013 ; 139.554,117.575 ccw(c139.554,121.871) R46.1@142.592,118.833 ; 140.167,117.575 ccw(c140.167,121.258) R46.1@142.771,118.654 ; 140.78,117.575 ccw(c140.78,120.645) R46.1@142.951,118.474 ; 141.393,117.575 ccw(c141.393,120.032) R46.1@143.13,118.295 ; R46.1@142.006,117.575 ccw(c142.006,119.419) R46.1@143.31,118.115
NetR7_1: R7.1 R10.2 U3.2 | length 9.9
  Bottom Layer w0.254: U3.2@137.283,112.653 cw(c136.987,112.357) 137.405,112.357 cw(c137.823,112.357) U3.2@137.527,112.653 ; U3.2@137.405,113.675 137.405,112.195 138.55,111.05 140.125,109.475 R7.1@140.4,109.475 ; 137.981,111.619 cw(c137.387,111.025) R10.2@138.227,111.025 ; 138.041,111.559 ccw(c138.55,112.067) R10.2@138.55,111.348 ; R10.2@138.55,110.602 cw(c138.55,109.52) 139.315,110.285 ; R10.2@138.873,110.925 ccw(c139.351,110.925) 139.013,110.587 ; 139.593,110.007 ccw(c140.4,110.815) R7.1@140.4,109.673 ; R7.1@139.955,109.645 cw(c139.659,109.35) R7.1@140.077,109.35
NetR7_2: R7.2 R11.1 U3.1 | length 19.3
  Bottom Layer w0.254: U3.1@138.618,113.457 cw(c139.143,112.932) 139.143,113.675 ; U3.1@138.675,113.675 140.225,113.675 140.4,113.5 R7.2@140.4,111.125 ; U3.1@138.797,113.278 cw(c139.757,112.318) 139.757,113.675 ; R7.2@140.172,111.228 ccw(c139.62,111.78) 140.4,111.78 ccw(c141.18,111.78) 140.628,111.228 ccw(c140.938,111.538) 140.938,111.1 ; R7.2@140.4,111.1 141.55,111.1 141.825,111.375 141.825,118.6 R11.1@142.525,119.3 ; R7.2@140.628,110.772 cw(c141.421,109.979) 141.421,111.1 ; 141.888,118.663 ccw(c141.252,119.3) R11.1@142.152,119.3 ; 142.009,118.784 cw(c142.475,118.318) R11.1@142.475,118.977
NetR8_1: R8.1 R12.2 U3.6 | length 18.3
  Mid-Layer 2 w0.254: v1(136.15,117.625) 139.025,120.5 v1(140.35,120.5) ; v1@136.15,117.748 ccw(c136.15,118.045) 136.36,117.835 ccw(c136.57,117.625) v1@136.273,117.625 ; v1@140.263,120.413 ccw(c140.053,120.203) 140.053,120.5 ccw(c140.053,120.797) v1@140.263,120.587
  Bottom Layer w0.254: U3.6@136.013,118.203 cw(c135.717,117.907) 136.135,117.907 cw(c136.553,117.907) U3.6@136.257,118.203 ; v1@136.063,117.712 ccw(c135.889,117.886) 136.135,117.886 ; 136.135,117.958 ccw(c136.483,117.958) v1@136.237,117.712 ; U3.6@136.135,119.225 136.135,117.64 v1(136.15,117.625) ; v1@140.263,120.587 ccw(c140.053,120.797) 140.35,120.797 ccw(c140.647,120.797) v1@140.437,120.587 ; v1(140.35,120.5) 140.35,120.9 ; v1@140.35,120.668 cw(c140.974,120.668) R8.1@140.862,121.282 ; 140.35,120.973 cw(c140.919,120.973) R8.1@140.817,121.532 ; 140.412,120.9 ccw(c140.842,120.784) v1@140.457,120.562 ; R8.1@140.527,121.342 cw(c139.922,121.328) 140.35,120.9 ; R8.1@140.787,121.033 ccw(c140.693,120.557) 140.35,120.9 ; R8.1@140.85,121.773 ccw(c140.85,122.553) 141.401,122.001 ccw(c141.953,121.45) R8.1@141.173,121.45 ; 141.788,122.388 cw(c142.425,121.752) R12.2@142.425,122.652 ; 141.909,122.509 ccw(c141.443,122.975) R12.2@142.102,122.975 ; R12.2@142.425,123.025 140.85,121.45 R8.1@140.85,121.4 140.35,120.9
OUT: F1.2 OUT.1 | length 16.5
  Top Layer w0.254: F1.2@163.989,98.475 v1(165.125,98.475) ; F1.2@164.531,98.143 cw(c165.125,97.777) v1(165.125,98.475) ; F1.2@164.531,98.807 ccw(c165.125,99.173) v1(165.125,98.475) ; v1@165.018,98.414 ccw(c164.761,98.265) 164.838,98.552 ccw(c164.915,98.839) v1@165.064,98.582 ; v1@165.018,98.536 cw(c164.761,98.685) 164.838,98.398 cw(c164.915,98.111) v1@165.064,98.368 ; v1@165.038,98.388 ccw(c164.828,98.178) 164.828,98.475 ccw(c164.828,98.772) v1@165.038,98.562
  Bottom Layer w0.254: OUT.1@162.475,100.075 OUT.1@163.425,101.025 ; OUT.1@164.006,100.03 cw(c163.699,98.637) v1@165.125,98.637 ; OUT.1@164.06,100.278 cw(c163.768,98.953) 165.125,98.953 ; OUT.1@164.115,100.526 cw(c163.838,99.269) 165.125,99.269 ; OUT.1@164.17,100.774 cw(c163.908,99.585) 165.125,99.585 ; OUT.1@164.224,101.022 cw(c163.977,99.901) OUT.1@165.125,99.901 ; v1@165.018,98.536 ccw(c164.637,98.757) 165.062,98.87 ; v1@165.038,98.562 ccw(c164.828,98.772) 165.125,98.772 ccw(c165.422,98.772) v1@165.212,98.562 ; v1(165.125,98.475) OUT.1@165.125,100.125
OUTPUT: R33.2 U2.7 | length 18.3
  Top Layer w0.2: v1@157.619,111.631 ccw(c157.363,111.887) 157.725,111.887 ccw(c158.087,111.887) v1@157.831,111.631 ; R33.2@157.653,112.078 cw(c157.478,111.903) R33.2@157.725,111.903 ; v1@157.683,111.669 ccw(c157.634,111.835) 157.801,111.79 ccw(c157.979,111.742) v1@157.839,111.623 ; v1@157.725,111.506 cw(c158.276,111.506) R33.2@158.046,112.007 ; v1(157.725,111.525) 157.725,112.1 R33.2@157.95,112.325 ; 157.725,111.818 cw(c158.133,111.818) R33.2@157.963,112.189
  Mid-Layer 2 w0.2: v1(147.025,110.725) 147.8,110.725 148.35,111.275 152.75,111.275 153.075,110.95 157.15,110.95 v1(157.725,111.525) ; v1@147.131,110.619 cw(c147.387,110.363) 147.387,110.725 cw(c147.387,111.087) v1@147.131,110.831 ; v1@157.575,111.525 cw(c157.213,111.525) 157.469,111.269 cw(c157.725,111.013) v1@157.725,111.375
  Bottom Layer w0.2: v1@146.919,110.831 ccw(c146.663,111.087) 147.025,111.087 ccw(c147.387,111.087) v1@147.131,110.831 ; v1(147.025,110.725) 147.025,111.4 147.418,111.793 U2.7@148.412,111.793
SIN: R4.2 SIN.1 | length 12.7
  Top Layer w0.254: v1@130.55,109.625 132.95,109.625 135.525,107.05 136.925,107.05 R4.2@137.9,106.075 ; v1@130.637,109.737 ccw(c130.907,110.007) 130.907,109.625 ; 137.263,106.712 cw(c136.627,106.075) R4.2@137.527,106.075 ; 137.384,106.591 ccw(c137.85,107.057) R4.2@137.85,106.398
  Bottom Layer w0.254: SIN.1@128.65,109.65 v1(130.55,109.65) ; v1@130.463,109.563 ccw(c130.253,109.353) 130.253,109.65 ccw(c130.253,109.947) v1@130.463,109.737
copper on no net: | length 1.7
  Bottom Layer w0.5: 142.525,103.55 143.4,103.55
  Bottom Layer w0.6: 142.525,103.55 143.4,103.55

## Polygon pours and split planes (outlines as drawn)
GND on Bottom Layer "TOP-No Net" (solid, remove dead copper, pour order 8): 128.275,120.175 128.275,114.225 132.65,109.85 132.9,109.6 132.9,108.375 132.9,108.3 133.275,107.925 141.775,107.925 142.075,108.225 142.075,115.8 142.45,116.175 145.475,116.175 145.875,116.575 145.875,126.25 146.8,127.175 156,127.175 167.925,115.25 167.925,94.2 155.975,82.25 135.325,82.25 122.275,95.3 122.275,115.775 126.525,120.025 126.65,120.15 128.225,120.15
GND on Mid-Layer 2 "TOP-No Net" (solid, remove dead copper, pour order 7): 128.275,120.175 128.275,114.225 132.65,109.85 132.9,109.6 132.9,108.375 132.9,108.3 133.275,107.925 141.775,107.925 142.075,108.225 142.075,115.8 142.45,116.175 145.475,116.175 145.875,116.575 145.875,126.25 146.8,127.175 156,127.175 167.925,115.25 167.925,94.2 155.975,82.25 135.325,82.25 122.275,95.3 122.275,115.775 126.525,120.025 126.65,120.15 128.225,120.15
GND on Top Layer "TOP-No Net" (solid, remove dead copper, pour order 6): 128.275,120.175 128.275,114.225 132.65,109.85 132.9,109.6 132.9,108.375 132.9,108.3 133.275,107.925 141.775,107.925 142.075,108.225 142.075,115.8 142.45,116.175 145.475,116.175 145.875,116.575 145.875,126.25 146.8,127.175 156,127.175 167.925,115.25 167.925,94.2 155.975,82.25 135.325,82.25 122.275,95.3 122.275,115.775 126.525,120.025 126.65,120.15 128.225,120.15
GND on GND "TOP-No Net" (solid, remove dead copper, pour order 9): 129.15,126.4 145.075,126.4 145.075,117.85 144.45,117.225 141.525,117.225 141.175,116.875 141.175,104.425 141.275,104.325 143.025,104.325 143.175,104.175 143.175,102.7 143.025,102.55 139.525,102.55 139.125,102.15 139.125,99.35 138.875,99.1 136.65,99.1 136.375,99.375 136.375,107.075 133.05,110.4 129.125,114.325 129.125,126.4
GND on GND "TOP-No Net" (solid, remove dead copper, pour order 10): 128.6,120.45 128.6,114.25 135.75,107.1 135.75,99.05 136.2,98.6 139.075,98.6 139.625,99.15 139.625,101.7 140.1,102.175 143.325,102.175 143.675,102.525 143.675,104.25 143.275,104.65 141.575,106.35 141.575,108.85 141.575,116.275 142.15,116.85 142.175,116.875 144.775,116.875 144.9,116.875 145.5,117.475 145.5,126.682 146.878,128.06 167.76,128.06 167.975,128.275 167.975,82.65 168.025,82.6 122.7,82.6 122.6,82.7 122.6,120.375 122.7,120.475 122.775,120.4 128.575,120.4

## Keep-outs
Keep-Out Layer:
  circle w0.15: c145.4,96.7 r3
  circle w0.2: c145.399,126.808 r0.001
  circle w0.2: c145.399,83.808 r0.001
  circle w0.2: c145.399,83.808 r0.001
  circle w0.2: c145.399,126.808 r0.001
  circle w0.15: c145.4,96.7 r3
  circle w0.15: c153.8,105.3 r3
  circle w0.15: c153.8,105.3 r3
  circle w0.15: c145.4,96.7 r3
  circle w0.2: c145.399,126.808 r0.001
  circle w0.2: c145.399,83.808 r0.001
  circle w0.2: c145.399,83.808 r0.001
  circle w0.2: c145.399,126.808 r0.001
  circle w0.15: c145.4,96.7 r3
  circle w0.15: c153.8,105.3 r3
  circle w0.15: c153.8,105.3 r3
  lines w0.2: 122.647,103.829 ccw(c145.399,105.308) 122.85,101.934 ; 122.647,103.829 ccw(c122.399,105.308) 122.647,106.787 ; 122.647,103.829 ccw(c122.399,105.308) 122.647,106.787 ; 122.647,103.829 ccw(c145.399,105.308) 122.85,101.934 ; 122.647,103.829 ccw(c145.399,105.308) 122.85,101.934 ; 122.647,103.829 ccw(c122.399,105.308) 122.647,106.787 ; 122.647,103.829 ccw(c122.399,105.308) 122.647,106.787 ; 122.647,103.829 ccw(c145.399,105.308) 122.85,101.934 ; 122.647,106.787 cw(c145.399,105.308) 143.919,128.06 ; 122.647,106.787 cw(c145.399,105.308) 143.919,128.06 ; 122.647,106.787 cw(c145.399,105.308) 143.919,128.06 ; 122.647,106.787 cw(c145.399,105.308) 143.919,128.06 ; 122.85,101.934 ccw(c123.344,102.008) 123.344,101.508 ; 122.85,101.934 ccw(c123.344,102.008) 123.344,101.508 ; 122.85,101.934 ccw(c123.344,102.008) 123.344,101.508 ; 122.85,101.934 ccw(c123.344,102.008) 123.344,101.508 ; 123.344,101.508 123.932,101.508 ; 123.344,101.508 123.932,101.508 ; 123.344,101.508 123.932,101.508 ; 123.652,98.458 cw(c124.129,98.608) 124.129,99.108 ; 123.652,98.458 ccw(c145.399,105.308) 143.919,82.556 ; 123.652,98.458 ccw(c145.399,105.308) 143.919,82.556 ; 123.652,98.458 cw(c124.129,98.608) 124.129,99.108 ; 123.652,98.458 cw(c124.129,98.608) 124.129,99.108 ; 123.652,98.458 ccw(c145.399,105.308) 143.919,82.556 ; 123.652,98.458 ccw(c145.399,105.308) 143.919,82.556 ; 123.652,98.458 cw(c124.129,98.608) 124.129,99.108 ; 123.932,101.508 ccw(c145.399,105.308) 124.499,99.108 ; 123.932,101.508 ccw(c145.399,105.308) 124.499,99.108 ; 123.932,101.508 ccw(c145.399,105.308) 124.499,99.108 ; 123.932,101.508 ccw(c145.399,105.308) 124.499,99.108 ; 124.129,99.108 124.499,99.108 ; 124.129,99.108 124.499,99.108 ; 124.129,99.108 124.499,99.108 ; 143.919,82.556 cw(c145.399,82.308) 146.878,82.556 ; 143.919,82.556 cw(c145.399,82.308) 146.878,82.556 ; 143.919,82.556 cw(c145.399,82.308) 146.878,82.556 ; 143.919,82.556 cw(c145.399,82.308) 146.878,82.556 ; 143.919,128.06 ccw(c145.399,128.308) 146.878,128.06 ; 143.919,128.06 ccw(c145.399,128.308) 146.878,128.06 ; 143.919,128.06 ccw(c145.399,128.308) 146.878,128.06 ; 143.919,128.06 ccw(c145.399,128.308) 146.878,128.06 ; 146.878,82.556 ccw(c145.399,105.308) 167.145,98.458 ; 146.878,82.556 ccw(c145.399,105.308) 167.145,98.458 ; 146.878,82.556 ccw(c145.399,105.308) 167.145,98.458 ; 146.878,82.556 ccw(c145.399,105.308) 167.145,98.458 ; 146.878,128.06 cw(c145.399,105.308) 168.151,106.787 ; 146.878,128.06 cw(c145.399,105.308) 168.151,106.787 ; 146.878,128.06 cw(c145.399,105.308) 168.151,106.787 ; 146.878,128.06 cw(c145.399,105.308) 168.151,106.787 ; 166.298,99.108 ccw(c145.399,105.308) 166.865,101.508 ; 166.298,99.108 ccw(c145.399,105.308) 166.865,101.508 ; 166.298,99.108 ccw(c145.399,105.308) 166.865,101.508 ; 166.298,99.108 ccw(c145.399,105.308) 166.865,101.508 ; 166.298,99.108 166.668,99.108 ; 166.298,99.108 166.668,99.108 ; 166.298,99.108 166.668,99.108 ; 166.668,99.108 cw(c166.668,98.608) 167.145,98.458 ; 166.668,99.108 cw(c166.668,98.608) 167.145,98.458 ; 166.668,99.108 cw(c166.668,98.608) 167.145,98.458 ; 166.668,99.108 cw(c166.668,98.608) 167.145,98.458 ; 166.865,101.508 167.453,101.508 ; 166.865,101.508 167.453,101.508 ; 166.865,101.508 167.453,101.508 ; 167.453,101.508 ccw(c167.453,102.008) 167.948,101.934 ; 167.453,101.508 ccw(c167.453,102.008) 167.948,101.934 ; 167.453,101.508 ccw(c167.453,102.008) 167.948,101.934 ; 167.453,101.508 ccw(c167.453,102.008) 167.948,101.934 ; 167.948,101.934 ccw(c145.399,105.308) 168.151,103.829 ; 167.948,101.934 ccw(c145.399,105.308) 168.151,103.829 ; 167.948,101.934 ccw(c145.399,105.308) 168.151,103.829 ; 167.948,101.934 ccw(c145.399,105.308) 168.151,103.829 ; 168.151,103.829 cw(c168.399,105.308) 168.151,106.787 ; 168.151,103.829 cw(c168.399,105.308) 168.151,106.787 ; 168.151,103.829 cw(c168.399,105.308) 168.151,106.787 ; 168.151,103.829 cw(c168.399,105.308) 168.151,106.787 ; 142.425,104.55 148.325,104.55 148.325,106.075 142.425,106.075 142.425,104.55

## Other copper
Top Layer:
  pour cut-out: 141.6,104.718 143.85,104.718 143.875,104.743 143.875,100.957 144.007,100.825 141.643,100.825 141.6,100.868
  pour cut-out: 155.925,111.7 157.325,111.7 157.325,110.9 157.35,110.875 155.925,110.875
  pour cut-out: 154,100.3 155.4,100.3 155.4,99.5 155.425,99.475 154,99.475
  pour cut-out: 151.925,96.825 153.325,96.825 153.325,96.025 153.35,96 151.925,96
  pour cut-out: 146.575,110.275 147.975,110.275 147.975,109.475 148,109.45 146.575,109.45
  pour cut-out: 141.975,114.012 141.975,115.412 142.775,115.412 142.8,115.438 142.8,114.012
  pour cut-out: 147.225,84.525 147.225,85.925 148.025,85.925 148.05,85.95 148.05,84.525
Mid-Layer 2:
  pour cut-out: 141.625,104.743 143.875,104.743 143.9,104.768 143.9,100.982 144.032,100.85 141.668,100.85 141.625,100.893
Bottom Layer:
  pour cut-out: 166.274,103.784 166.274,104.884 166.874,104.884 166.899,104.859 166.899,103.809 166.799,103.709 166.349,103.709
  pour cut-out: 141.625,104.743 143.875,104.743 143.9,104.768 143.9,100.982 144.032,100.85 141.668,100.85 141.625,100.893
  pour cut-out: 148.825,107.175 149.925,107.175 149.925,106.575 149.9,106.55 148.85,106.55 148.75,106.65 148.75,107.1
  pour cut-out: 142.259,114.187 142.259,115.287 142.859,115.287 142.884,115.262 142.884,114.212 142.784,114.112 142.334,114.112
  pour cut-out: 133.234,90.987 133.234,92.087 133.834,92.087 133.859,92.062 133.859,91.012 133.759,90.912 133.309,90.912

## Silkscreen, mask and mechanical layers (free items; w line width, h text height)
Top Overlay:
  lines w0.2: 134.3,110.3 135,109.6 135,106.625 135.225,106.4 135.4,106.4 ; 135.1,88.35 136.625,89.875 136.9,89.875 ; 153.5,118.725 153.725,118.725 154.375,118.075 154.375,116.875 ; 153.525,120.275 153.65,120.275 155.05,121.675 ; 156.05,102.625 156.95,103.525 156.95,103.775 ; 160.15,103 160.15,102.7 161.7,101.15
Bottom Overlay:
  lines w0.2: 147.85,91.675 149.15,90.375 149.15,90.275
  text "R3N3" at 149.15,85.425 h1.5
  text "800U" at 152.7,85.35 h1.5
  text "20160727" at 141.375,84.975 h1.5
  text "_LED_V1.0" at 152.7,84.05 h1.5
Mechanical 1:
  circle w0.15: c145.4,96.7 r3
  circle w0.2: c145.399,126.808 r0.001
  circle w0.2: c145.399,83.808 r0.001
  circle w0.2: c145.399,83.808 r0.001
  circle w0.2: c145.399,126.808 r0.001
  circle w0.15: c145.4,96.7 r3
  circle w0.15: c153.8,105.3 r3
  circle w0.15: c153.8,105.3 r3
  circle w0.15: c145.4,96.7 r3
  circle w0.2: c145.399,126.808 r0.001
  circle w0.2: c145.399,83.808 r0.001
  circle w0.2: c145.399,83.808 r0.001
  circle w0.2: c145.399,126.808 r0.001
  circle w0.15: c145.4,96.7 r3
  circle w0.15: c153.8,105.3 r3
  lines w0.005: -0.127,0.508 -0.127,210.508 296.873,210.508 296.873,0.508 -0.127,0.508
  lines w0.2: 122.647,103.829 ccw(c145.399,105.308) 122.85,101.934 ; 122.647,103.829 ccw(c122.399,105.308) 122.647,106.787 ; 122.647,103.829 ccw(c122.399,105.308) 122.647,106.787 ; 122.647,103.829 ccw(c145.399,105.308) 122.85,101.934 ; 122.647,103.829 ccw(c145.399,105.308) 122.85,101.934 ; 122.647,103.829 ccw(c122.399,105.308) 122.647,106.787 ; 122.647,103.829 ccw(c122.399,105.308) 122.647,106.787 ; 122.647,103.829 ccw(c145.399,105.308) 122.85,101.934 ; 122.647,106.787 cw(c145.399,105.308) 143.919,128.06 ; 122.647,106.787 cw(c145.399,105.308) 143.919,128.06 ; 122.647,106.787 cw(c145.399,105.308) 143.919,128.06 ; 122.647,106.787 cw(c145.399,105.308) 143.919,128.06 ; 122.85,101.934 ccw(c123.344,102.008) 123.344,101.508 ; 122.85,101.934 ccw(c123.344,102.008) 123.344,101.508 ; 122.85,101.934 ccw(c123.344,102.008) 123.344,101.508 ; 122.85,101.934 ccw(c123.344,102.008) 123.344,101.508 ; 123.344,101.508 123.932,101.508 ; 123.652,98.458 cw(c124.129,98.608) 124.129,99.108 ; 123.652,98.458 ccw(c145.399,105.308) 143.919,82.556 ; 123.652,98.458 ccw(c145.399,105.308) 143.919,82.556 ; 123.652,98.458 cw(c124.129,98.608) 124.129,99.108 ; 123.652,98.458 cw(c124.129,98.608) 124.129,99.108 ; 123.652,98.458 ccw(c145.399,105.308) 143.919,82.556 ; 123.652,98.458 ccw(c145.399,105.308) 143.919,82.556 ; 123.652,98.458 cw(c124.129,98.608) 124.129,99.108 ; 123.932,101.508 ccw(c145.399,105.308) 124.499,99.108 ; 123.932,101.508 ccw(c145.399,105.308) 124.499,99.108 ; 123.932,101.508 ccw(c145.399,105.308) 124.499,99.108 ; 123.932,101.508 ccw(c145.399,105.308) 124.499,99.108 ; 124.129,99.108 124.499,99.108 ; 143.919,82.556 cw(c145.399,82.308) 146.878,82.556 ; 143.919,82.556 cw(c145.399,82.308) 146.878,82.556 ; 143.919,82.556 cw(c145.399,82.308) 146.878,82.556 ; 143.919,82.556 cw(c145.399,82.308) 146.878,82.556 ; 143.919,128.06 ccw(c145.399,128.308) 146.878,128.06 ; 143.919,128.06 ccw(c145.399,128.308) 146.878,128.06 ; 143.919,128.06 ccw(c145.399,128.308) 146.878,128.06 ; 143.919,128.06 ccw(c145.399,128.308) 146.878,128.06 ; 146.878,82.556 ccw(c145.399,105.308) 167.145,98.458 ; 146.878,82.556 ccw(c145.399,105.308) 167.145,98.458 ; 146.878,82.556 ccw(c145.399,105.308) 167.145,98.458 ; 146.878,82.556 ccw(c145.399,105.308) 167.145,98.458 ; 146.878,128.06 cw(c145.399,105.308) 168.151,106.787 ; 146.878,128.06 cw(c145.399,105.308) 168.151,106.787 ; 146.878,128.06 cw(c145.399,105.308) 168.151,106.787 ; 146.878,128.06 cw(c145.399,105.308) 168.151,106.787 ; 166.298,99.108 ccw(c145.399,105.308) 166.865,101.508 ; 166.298,99.108 ccw(c145.399,105.308) 166.865,101.508 ; 166.298,99.108 ccw(c145.399,105.308) 166.865,101.508 ; 166.298,99.108 ccw(c145.399,105.308) 166.865,101.508 ; 166.298,99.108 166.668,99.108 ; 166.668,99.108 cw(c166.668,98.608) 167.145,98.458 ; 166.668,99.108 cw(c166.668,98.608) 167.145,98.458 ; 166.668,99.108 cw(c166.668,98.608) 167.145,98.458 ; 166.668,99.108 cw(c166.668,98.608) 167.145,98.458 ; 166.865,101.508 167.453,101.508 ; 167.453,101.508 ccw(c167.453,102.008) 167.948,101.934 ; 167.453,101.508 ccw(c167.453,102.008) 167.948,101.934 ; 167.453,101.508 ccw(c167.453,102.008) 167.948,101.934 ; 167.453,101.508 ccw(c167.453,102.008) 167.948,101.934 ; 167.948,101.934 ccw(c145.399,105.308) 168.151,103.829 ; 167.948,101.934 ccw(c145.399,105.308) 168.151,103.829 ; 167.948,101.934 ccw(c145.399,105.308) 168.151,103.829 ; 167.948,101.934 ccw(c145.399,105.308) 168.151,103.829 ; 168.151,103.829 cw(c168.399,105.308) 168.151,106.787 ; 168.151,103.829 cw(c168.399,105.308) 168.151,106.787 ; 168.151,103.829 cw(c168.399,105.308) 168.151,106.787 ; 168.151,103.829 cw(c168.399,105.308) 168.151,106.787 ; 142.425,104.55 142.425,106.075 148.325,106.075 148.325,104.55 142.425,104.55
Mechanical 3:
  circle w0.1: c145.399,105.308 r21.5
  circle w0.15: c212.915,114.19 r2.5
  circle w0.15: c213.025,97.09 r2.5
  circle w0.15: c204.695,105.62 r2.5
  circle w0.15: c221.365,105.58 r2.5
  lines w0.2: 121.125,105.3 172.925,105.3 ; 127.052,123.654 163.68,87.026 ; 127.426,87.345 164.054,123.973 ; 145.4,79.075 145.4,129.15
Mechanical 5:
  lines w0.2: 128.725,119.5 128.725,114.225 133.175,109.775 133.175,108.325 141.7,108.325 141.7,116.675 145.475,116.675 145.475,126.425